# EAGLE board back (EAGLE 9.6.2)

Size 126 x 126 mm. Coordinates in mm from the lower left corner, seen from the top.
Outline: 0,112 0,14 arc90 14,0 112,0 arc90 126,14 126,112 arc90 112,126 14,126 arc90 0,112
Outline: 35.5,46 35.5,22.5 arc90 37.5,20.5 88.5,20.5 arc90 90.5,22.5 90.5,46 arc90 88.5,48 37.5,48 arc90 35.5,46
Outline: circle at 63,105 radius 19
Outline: circle at 99,99 radius 5
Outline: circle at 27,41.75 radius 5
Outline: circle at 99,41.75 radius 5
Outline: circle at 27,26.75 radius 5
Outline: circle at 99,26.75 radius 5
Copper layers (1*16): Top 0.1mm / dielectric 1.4mm / Bottom 0.1mm
Design rules "default *": minimum track width 6mil, minimum drill 0.35mm, track to track 6mil, track to pad 6mil, pad to pad 6mil, via to via 6mil, smd to smd 6mil, copper to edge 40mil, drill to drill 6mil, minimum pad ring 10mil, minimum via ring 8mil, stop-mask expansion 4mil, vias tented up to drill 0mil, thermal gap 10mil

## Footprints (pad centres in the part's own frame; a part is rotated, then mirrored left to right if it is on the bottom)
MOUNTHOLE_6X3 = hole 3.3: 0,0

## Placement (x,y rotation side)
E$1  [MOUNTHOLE_6X3]  26,68 0 top
E$2  [MOUNTHOLE_6X3]  100,68 0 top
E$5  [MOUNTHOLE_6X3]  26,122 0 top
E$6  [MOUNTHOLE_6X3]  100,122 0 top
E$7  [MOUNTHOLE_6X3]  4,100 0 top
E$8  [MOUNTHOLE_6X3]  4,26 0 top
E$9  [MOUNTHOLE_6X3]  26,4 0 top
E$10  [MOUNTHOLE_6X3]  100,4 0 top
E$11  [MOUNTHOLE_6X3]  122,26 0 top
E$12  [MOUNTHOLE_6X3]  122,100 0 top

## Library data of the parts
E$1 E$2 E$5-E$12 = MISC